# Altium PCB Instrumentation-Amplifier.PcbDoc
Units mm, origin at the board's own origin, x right, y up, seen from the top; angles counter-clockwise.
Board outline 100 x 100 mm, 2 copper layers (Top Layer, Bottom Layer); 19 components, 15 nets, 57 pads, 3 vias.
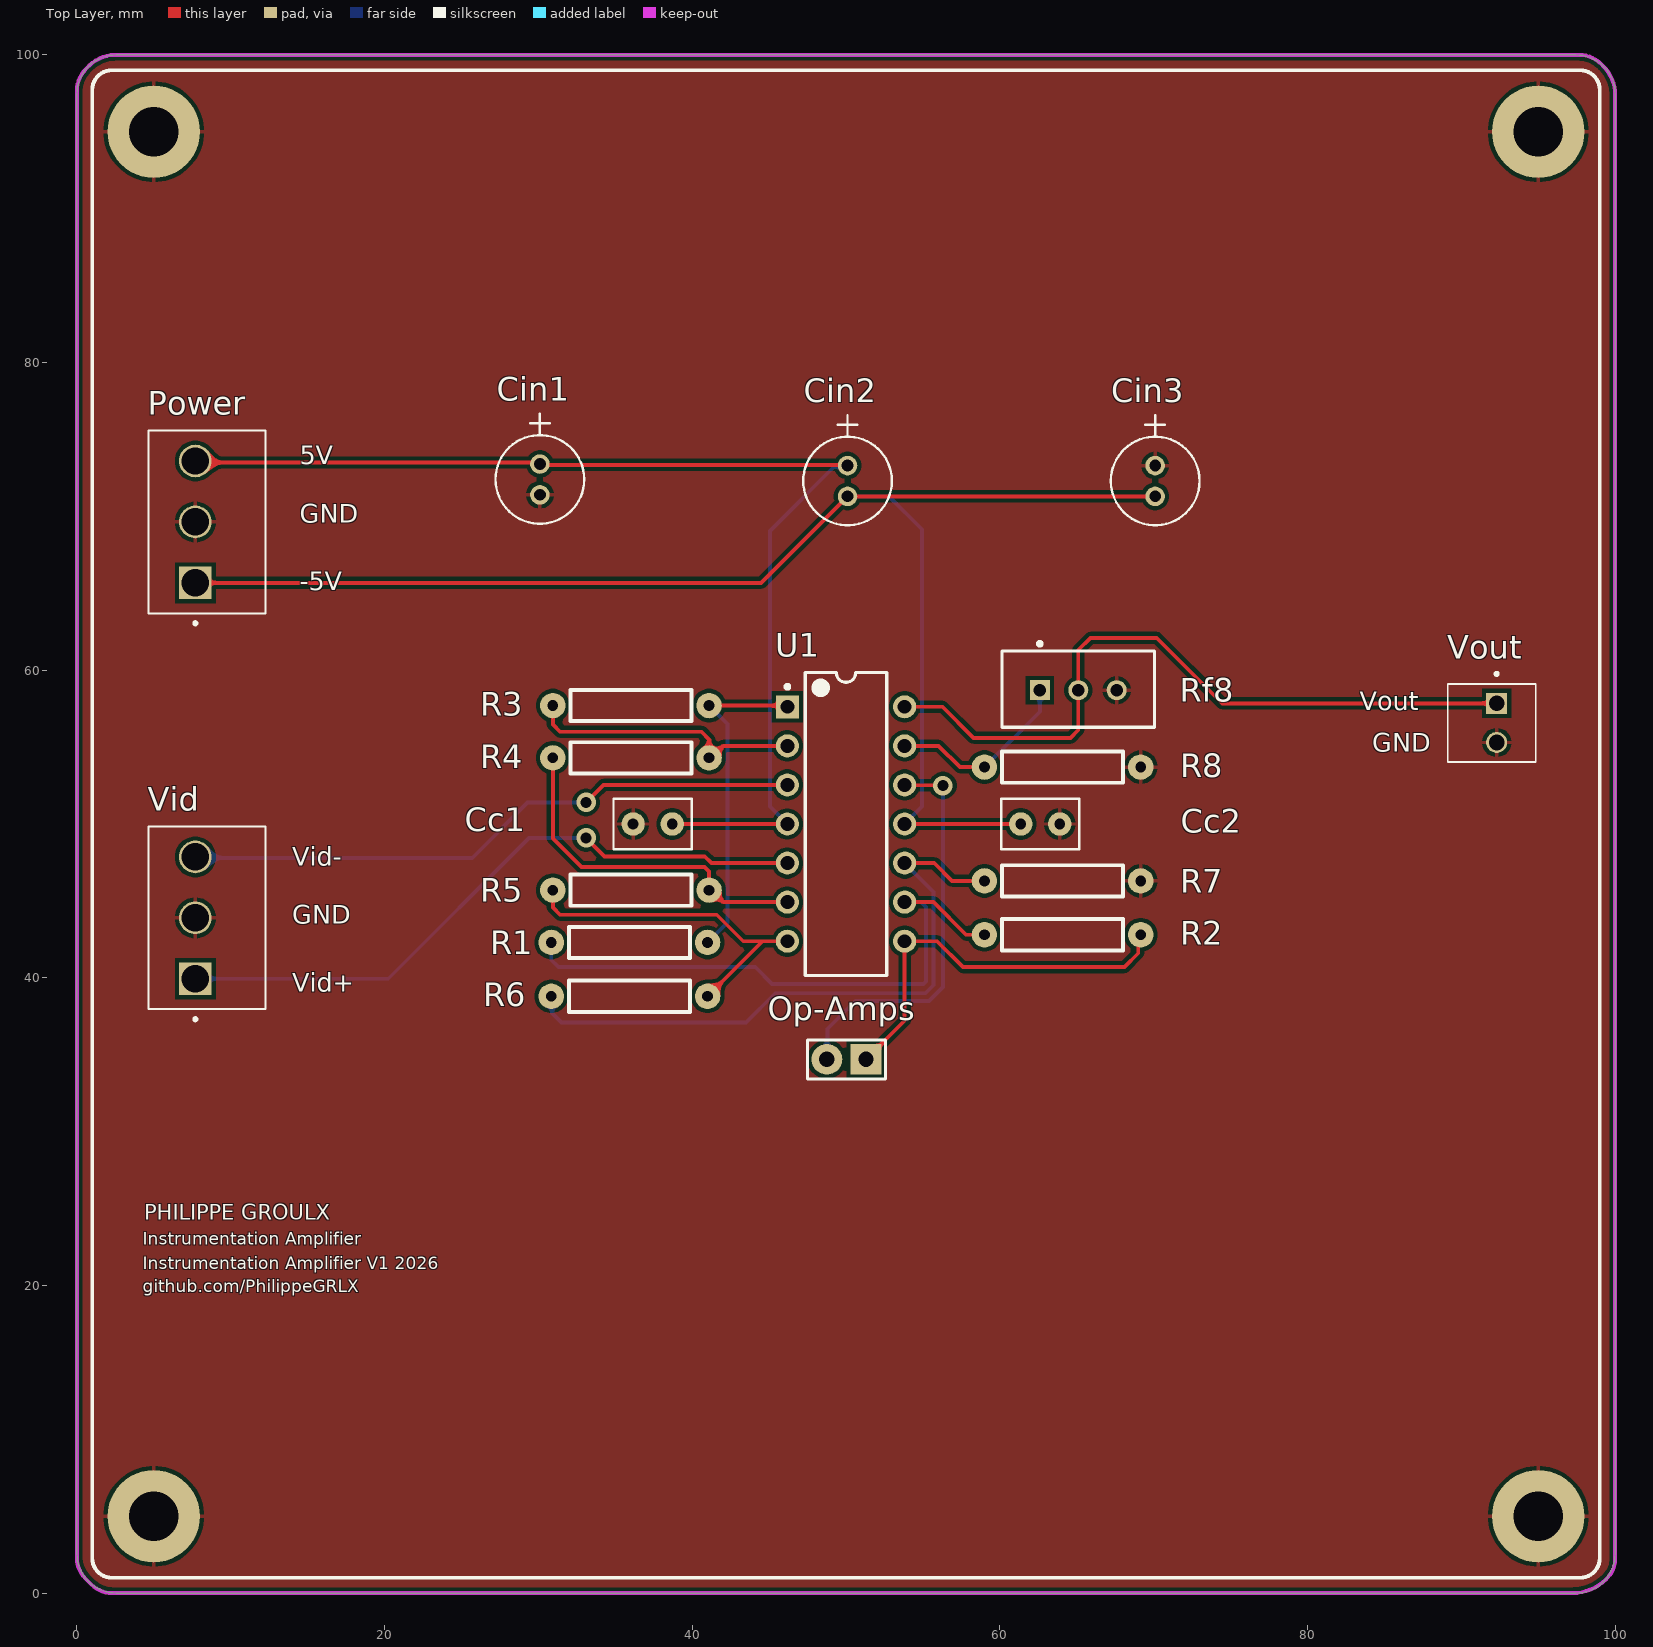
[diagram p0: Top Layer view]
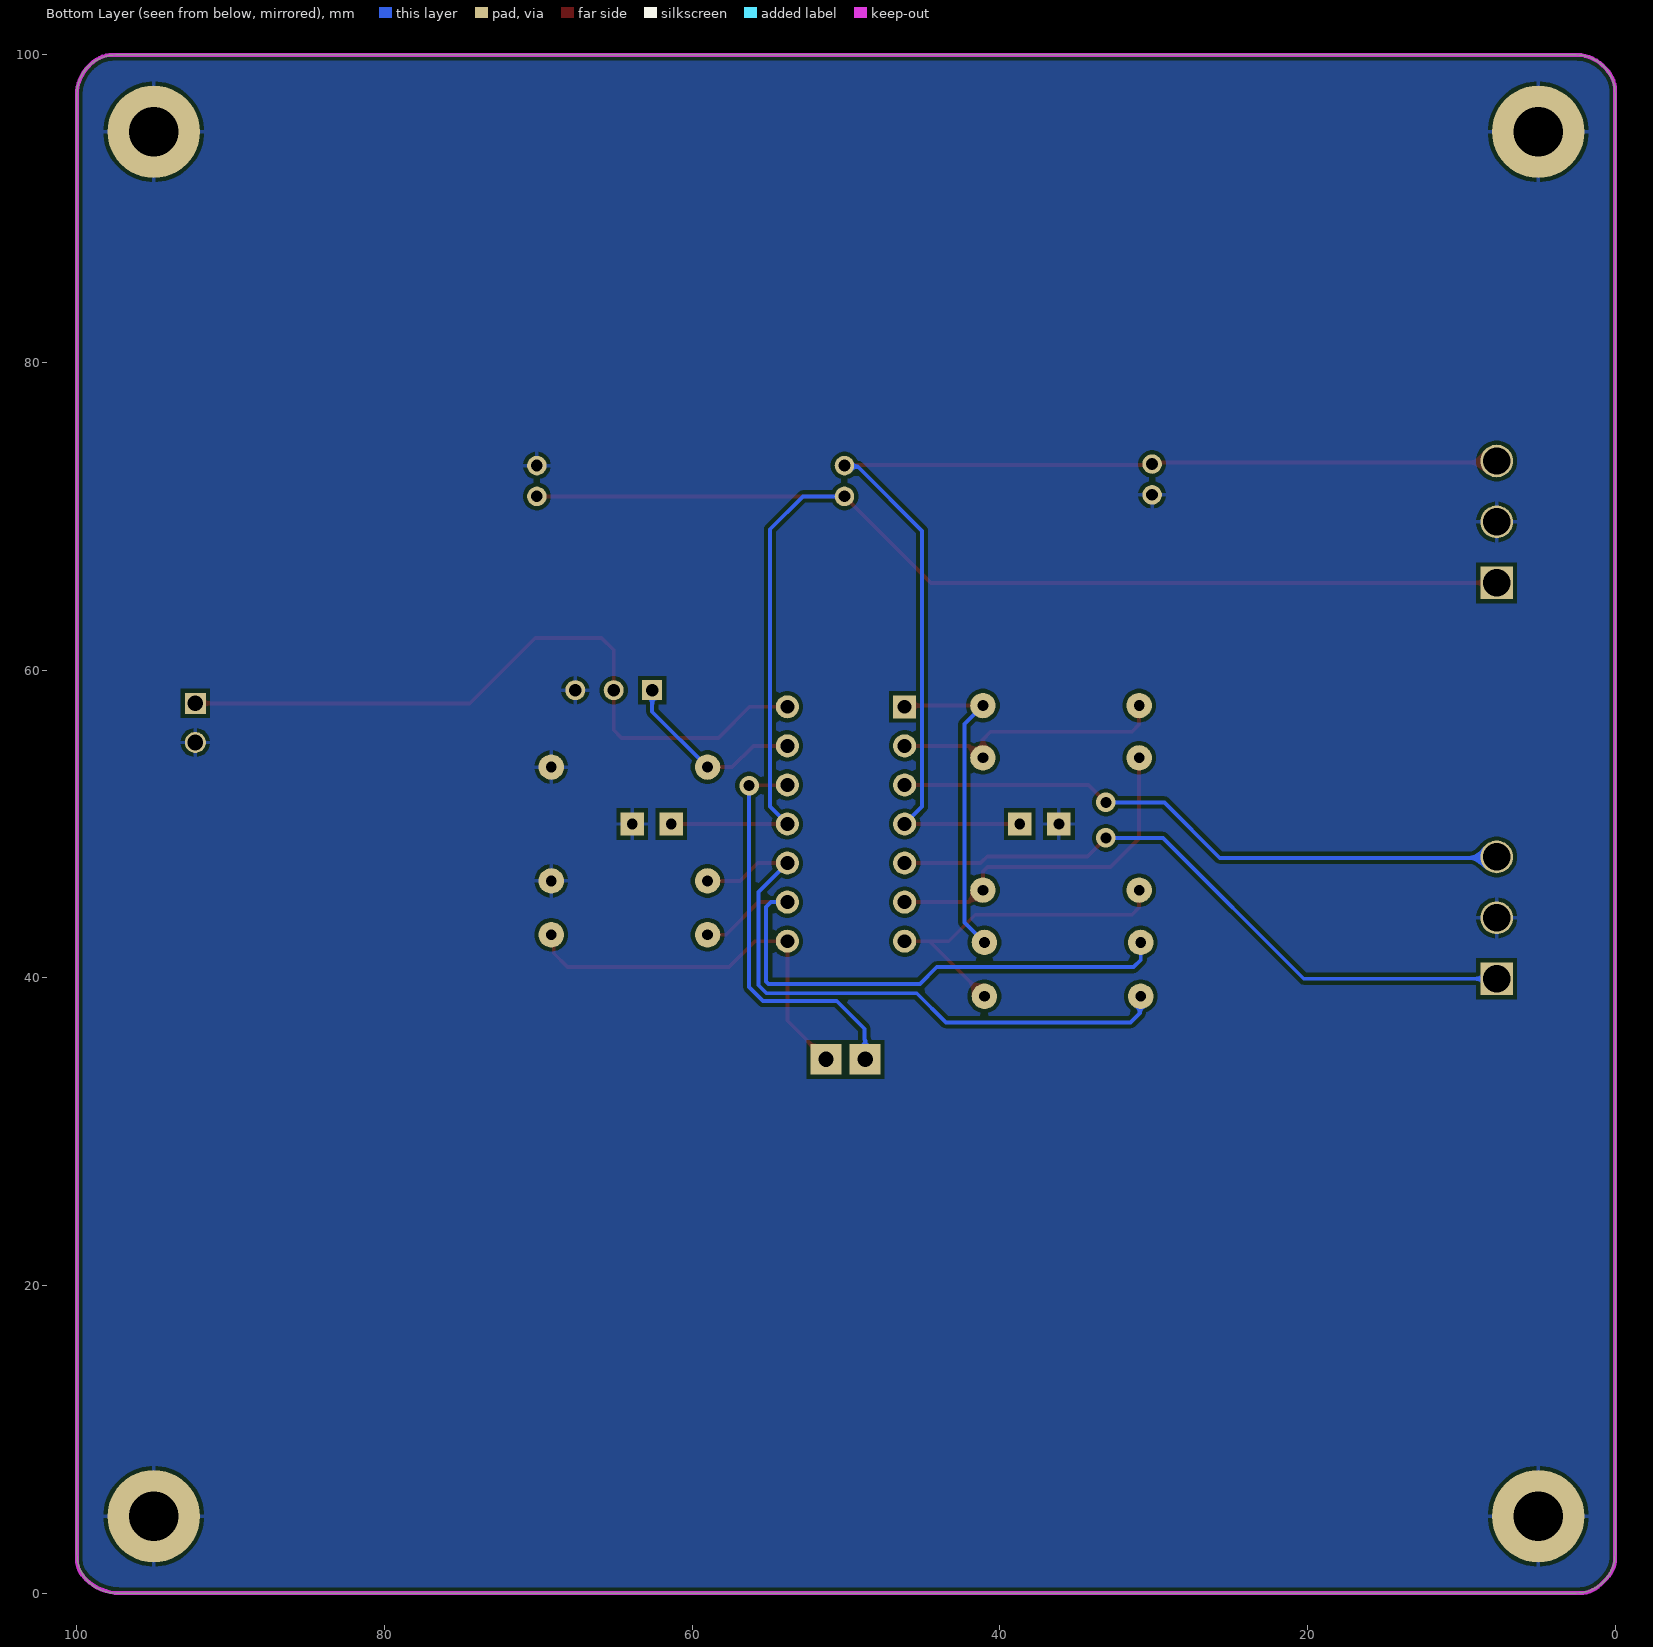
[diagram p1: Bottom Layer view, seen from below]
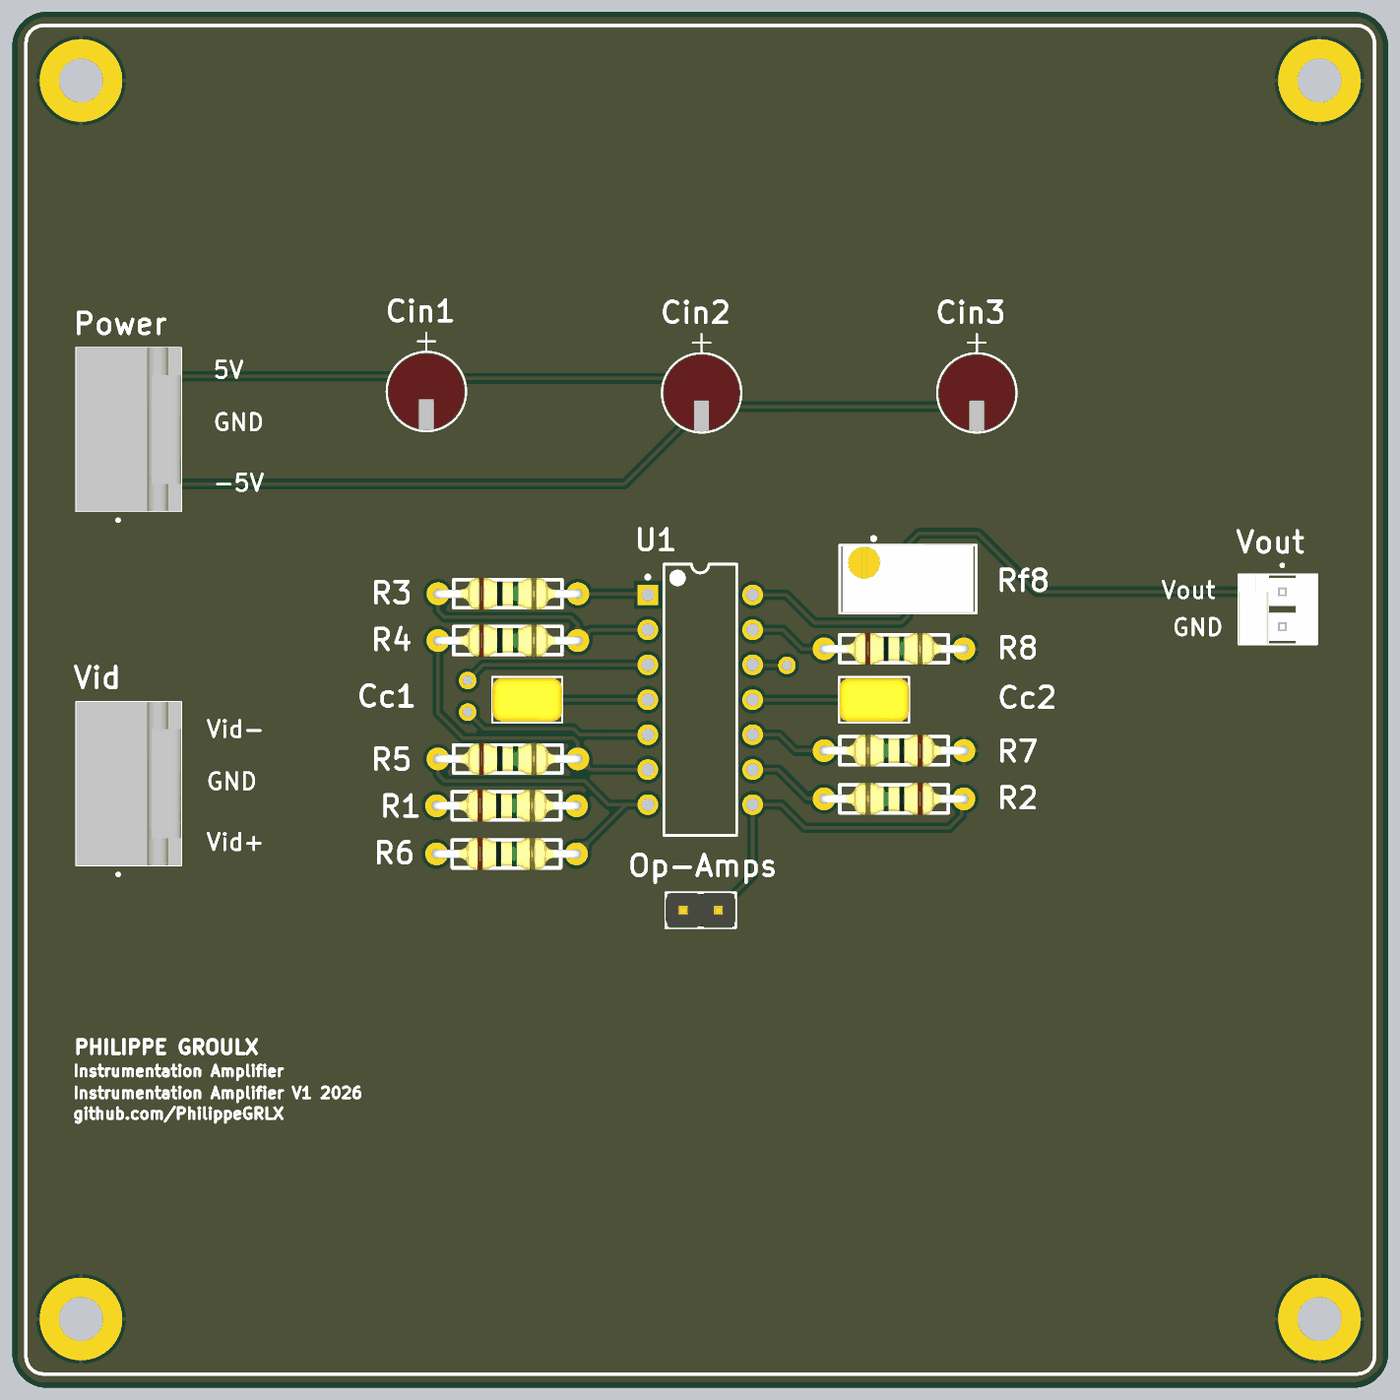
[diagram p2: 3D render of the assembled board from above, using the file's embedded part models]

## Layer stack, top to bottom
Top Solder: solder mask 0.0102, Solder Resist, Dk 3.5
Top Layer: signal copper 0.0356
Dielectric 1: dielectric 0.32, FR-4, Dk 4.8
Bottom Layer: signal copper 0.0356
Bottom Solder: solder mask 0.0102, Solder Resist, Dk 3.5

## Board outline
0,97.46 cw(c2.54,97.46) 2.54,100 97.46,100 cw(c97.46,97.46) 100,97.46 100,2.54 cw(c97.46,2.54) 97.46,0 2.54,0 cw(c2.54,2.54) 0,2.54 0,3.6

## Design rules (kind name [scope] priority, off if disabled: settings)
Clearance [All] p1: gap=0.254 ignorepadtopadclearanceinfootprint=FALSE
PolygonConnect [All] p1: connectstyle=Relief reliefconductorwidth=0.254 reliefentries=4 polygonreliefangle="90 Angle" airgapwidth=0.254
RoutingVias [All] p1: holewidth=0.711 width=1.27 viastyle="Through Hole" minholewidth=0.711 minwidth=1.27 maxholewidth=0.711 maxwidth=1.27
SolderMaskExpansion [All] p1: expansion=0 istentingtop=FALSE
SupplyNets "Schematic Supply Nets_2" [InNet('VDD')] p1: voltage=0.000
SupplyNets "Schematic Supply Nets_1" [InNet('GND')] p2: voltage=0.000
SupplyNets "Schematic Supply Nets" [InNet('VSS')] p3: voltage=0.000
Width [All] p1: maxlimit=0.254 minlimit=0.254 preferedwidth=0.254
30 further rules are at their usual default settings.

## Components (designator, comment, footprint, x,y, rotation, side; value= is the part's Value field where it differs from the comment)
Cc1 "Cap" "condensateur 0.1uf 100mil" 38.7,50 r180 top value=100nF
Cc2 "Cap" "condensateur 0.1uf 100mil" 61.36,50 r0 top value=100nF
Cin1 "Cap Pol1" RB7.6-15 30.1,73.4 r270 top value=10uF
Cin2 "Cap Pol1" RB7.6-15 50.1,73.3 r270 top value=10uF
Cin3 "Cap Pol1" RB7.6-15 70.1,73.3 r270 top value=10uF
Op-Amps "Jumper" "Header 2P 100mil" 51.3,34.7 r180 top
Power "Header 3" MTA_3M 7.7,65.68 r90 top
R1 "Res1" "Resistor_Axial 0.4" 30.84,42.3 r0 top value=1K
R2 "Res1" "Resistor_Axial 0.4" 69.16,42.8 r180 top value=1K
R3 "Res1" "Resistor_Axial 0.4" 30.94,57.7 r0 top value=1K
R4 "Res1" "Resistor_Axial 0.4" 30.94,54.3 r0 top value=200
R5 "Res1" "Resistor_Axial 0.4" 30.94,45.7 r0 top value=1K
R6 "Res1" "Resistor_Axial 0.4" 30.84,38.8 r0 top value=1K
R7 "Res1" "Resistor_Axial 0.4" 69.16,46.3 r180 top value=1K
R8 "Res1" "Resistor_Axial 0.4" 59,53.7 r0 top value=1K
Rf8 "67WR100KLF" FP-67W-MFG 65.1,58.765 r180 top
U1 "TL084ACN" N0014A 50,50 r0 top
Vid "Header 3" MTA_3M 7.7,39.94 r90 top
Vout "640456-2" TE_640456-2 92.3,57.84 r90 top

## Footprints (in the part's own frame and the unit in brackets; to place one, negate y for a bottom-side part, rotate by r counter-clockwise, add the part's x,y. Pads: shape width x height; smd on the part's side, far side on the other; paste and mask are expansions set on the pad)
"condensateur 0.1uf 100mil" [mil] "condensateur 0.1uf 100mil, Thru hole"
  round 60 / inner round 60 / far side rect 60x60 hole 27.56: 1(0,0) 2(100,0)
  silkscreen extent -50,-65 150,65, body extent -50,-63 150,62, height 309
FP-67W-MFG [mm]
  rect 1.3x1.3 hole 0.8 paste-2539.97 mask+0: 1(2.5,0.065)
  round 1.3 hole 0.8 paste-2539.97 mask+0: 2(0,0.065) 3(-2.5,0.065)
  silkscreen extent -4.95,-3.07 4.95,2.47, body extent -5.05,-2.58 5.05,2.58, height 0.25
"Header 2P 100mil" [mm] "Header male"
  rect 2x2 hole 1: 1(0,0)
  round 2 / inner round 2 / far side rect 2x2 hole 1: 2(2.54,0)
  silkscreen extent -1.27,-1.27 3.81,1.27, body extent -1.27,-1.27 3.81,1.27, height 8.59
MTA_3M [mil]
  rect 83.78x83.78 / inner round 83.78 / far side rect 83.78x83.78 hole 70 mask+4.02: 1(0,0)
  round 83.78 hole 70 mask+4.02: 2(155.91,0) 3(311.81,0)
  silkscreen extent -108,-180 390,120, body extent -78,-180 390,120, height 526
N0014A [mm] "DIP, 14-Leads, Body 19.7x6.6mm, Pitch 2.54mm"
  rect 1.5x1.5 hole 0.9: 1(-3.81,7.62)
  round 1.5 hole 0.9: 2(-3.81,5.08) 3(-3.81,2.54) 4(-3.81,0) 5(-3.81,-2.54) 6(-3.81,-5.08) 7(-3.81,-7.62) 8(3.81,-7.62) 9(3.81,-5.08) 10(3.81,-2.54) 11(3.81,0) 12(3.81,2.54) 13(3.81,5.08) 14(3.81,7.62)
  silkscreen extent -3.93,-9.85 2.65,9.85, body extent -3.95,-9.85 3.95,9.85, height 5.08
RB7.6-15 [mil] "Polarized Capacitor (Radial); 2 Leads"
  round 50 hole 30 paste-99999 mask+0: 1(0,0) 2(78.74,0)
  silkscreen extent -129,-113 153,114, body extent -69,-108 149,108, height 493
"Resistor_Axial 0.4" [mil] "Résistance 1/4 watt 0.4p"
  round 65 hole 27.56: 1(0,0) 2(400,0)
  silkscreen extent 45,-40 355,40, body extent -12,-45 412,46, height 116
TE_640456-2 [mm]
  rect 1.37x1.37 / inner round 1.37 / far side rect 1.37x1.37 hole 1.02: 1(0,0)
  round 1.37 hole 1.02: 2(-2.54,0)
  silkscreen extent -3.81,-2.54 2.02,3.18, body extent -3.81,-2.54 1.27,3.17, height 10.03

## Part data
Cc1 Cc2: "Capacitor", LatestRevisionDate=17-Jul-2002, LatestRevisionNote="Re-released for DXP Platform.", PackageDescription="Radial Cap, Thru-Hole; 2 Leads; 0.3 in Pin Spacing", PackageReference=RAD-0.3, Published=8-Jun-2000, Publisher="Altium Limited"
Cin1 Cin2 Cin3: "Polarized Capacitor (Radial)", LatestRevisionDate=17-Jul-2002, LatestRevisionNote="Re-released for DXP Platform.", PackageDescription="Polarized Capacitor (Radial); 2 Leads", PackageReference=RB7.6-15, Published=8-Jun-2000, Publisher="Altium Limited"
Op-Amps: library part "header 2 pin_UL", "CONN HEADER VERT 3POS 2.54MM", Digikey=732-5315-ND, LatestRevisionDate=17-Jul-2002, LatestRevisionNote="Re-released for DXP Platform.", Publisher="Altium Limited"
Power Vid: "Header, 3-Pin", LatestRevisionDate=17-Jul-2002, LatestRevisionNote="Re-released for DXP Platform.", Publisher="Altium Limited"
R1 R2 R3 R4 R5 R6 R7 R8: "Resistor", LatestRevisionDate=17-Jul-2002, LatestRevisionNote="Re-released for DXP Platform.", PackageDescription="Axial Device, Thru-Hole; 2 Leads; 0.3 in Pin Spacing", PackageReference=AXIAL-0.3, Published=8-Jun-2000, Publisher="Altium Limited"
Rf8: library part CMP-50449-000002-1, "TRIMMER 100K OHM 0.5W PC PIN TOP", Max Operating Temperature=125°C, Max Power Dissipation=500mW, Min Operating Temperature=-55°C, Package Quantity=100, Resistance=100kR, Resistance Tolerance=10%, Resistor Type=Cermet, Temperature Coefficient=100ppm/°C, Voltage Rating=200V, Depth=4.95mm, Height=0.409inch, Lead Free="Lead Free", Length=9.53mm, Military Standard=Not, Mount="Through Hole", Number of Turns=20, Packaging=Bulk, Power Rating=500mW, Radiation Hardening=No, REACH SVHC="No SVHC", RoHS Compliant=Yes, Series=67, Technology=CERMET, Termination=Pin, Tolerance=10%, Type=Potentiometer, Voltage Rating (DC)=200V, Weight=1.1g
U1: library part CMP-0017-00814-2, "JFET-Input Operational Amplifier, 7 to 36 V, 0 to 70 degC, 14-pin DIP (N14), Pb-Free (RoHS)", Manufacturer="Texas Instruments", Rating=Catalog, Total Supply Voltage(Max)(+5V is 5, +/-5V is 10)=36, Total Supply Voltage(Min)(+5V is 5, +/-5V is 10)=7, CMRR(Min)(dB)=75, Code_JEDEC=MS-001, ComponentLink1Description="Manufacturer URL", ComponentLink1URL=http://www.ti.com/, ComponentLink2Description=Datasheet, ComponentLink2URL=http://www.ti.com/lit/ds/symlink/tl084a.pdf, ComponentLink3Description="Package Specification", ComponentLink3URL=http://www.ti.com/lit/ml/mpdi002c/mpdi002c.pdf, DatasheetVersion=SLOS081G, Eco-Plan="Pb-Free (RoHS)", GBW(Typ)(MHz)=3, IIB(Max)(pA)=200, Iq per channel(Max)(mA)=2.8, Mounting Technology="Through Hole", Number of Channels=4, Offset Drift(Typ)(uV/C)=18, PackageDescription="14-Pin Plastic In-Line, Body 19.305 x 6.35 mm, Pitch 2.54 mm", PackageReference=N0014A, PackageVersion="4040049/E, 12/2002", PartNumber=TL084ACN, Slew Rate(Typ)(V/us)=13, Sub Family="General Purpose Amplifier, High Supply Voltage Amplifier (>=30V)", Vio (25C)(Max)(mV)=6, Vn at 1kHz(Typ)(nV/rtHz)=18
Vout: "Header Friction Lock MTA-100 2 250 VAC Polyester Tin Copper Alloy Tin", Package=None, Check_prices=https://www.snapeda.com/parts/640456-2/TE+Connectivity+AMP+Connectors/view-part/?ref=eda, MF="TE Connectivity", MP=640456-2, SnapEDA_Link=https://www.snapeda.com/parts/640456-2/TE+Connectivity+AMP+Connectors/view-part/?ref=snap

## Free pads (board coordinates)
  round 6 hole 3.2: 1(5,5) 1(5,95) 1(95,5) 1(95,95)

## Via types
v1: diameter 1.27, hole 0.711, Top Layer to Bottom Layer, 3 vias

## Nets (pads, with @x,y where several pads share a name; then routed paths per layer and width w, separated by ;. In a path a pad name is that pad's centre, name@x,y a point inside that pad or via, vN(x,y) a via of type N, cw(c..) or ccw(c..) an arc to the next point about the centre after c; other vN are vias at no path point)
GND: Cc1.2 Cc2.2 Cin1.2 Cin3.1 pad.1 Power.2 R7.1 R8.2 Rf8.3 Vid.2 Vout.2
NetOp-Amps_1: Op-Amps.1 R2.1 U1.8 | length 26.2
  Top Layer w0.254: Op-Amps.1 53.81,37.21 U1.8 55.92,42.38 57.6,40.7 68.1,40.7 69,41.6 69,42.64 R2.1
NetOp-Amps_2: Op-Amps.2 U1.12 | length 26.2
  Top Layer w0.254: U1.12 53.83,52.52 56.28,52.52 v1(56.3,52.5)
  Bottom Layer w0.254: Op-Amps.2 48.76,35.96 48.8,36 48.8,36.692 50.6,38.492 55.392,38.492 56.3,39.4 v1(56.3,52.5)
NetR1_1: R1.1 R2.2 U1.9 | length 38.6
  Top Layer w0.254: U1.9 55.68,44.92 57.8,42.8 R2.2
  Bottom Layer w0.254: R1.1 30.84,41.16 31.3,40.7 44.1,40.7 45.2,39.6 55.043,39.6 55.192,39.749 55.192,44.608 54.88,44.92 U1.9
NetR1_2: R1.2 R3.2 U1.1 | length 21.6
  Top Layer w0.254: R3.2 46.11,57.7 U1.1
  Bottom Layer w0.254: R1.2 42.306,43.606 42.306,56.493 R3.2
NetR3_1: R3.1 R4.2 U1.2 | length 18.4
  Top Layer w0.254: R3.1 30.94,56.46 31.4,56 40.6,56 41.1,55.5 R4.2 41.246,54.3 42.026,55.08 U1.2
NetR4_1: R4.1 R5.2 U1.6 | length 22.9
  Top Layer w0.254: R4.1 30.94,49.06 32.8,47.2 40.8,47.2 41.1,46.9 R5.2 41.246,45.7 42.026,44.92 U1.6
NetR5_1: R5.1 R6.2 U1.7 | length 22.4
  Top Layer w0.254: R5.1 30.94,44.56 31.4,44.1 41.6,44.1 43.32,42.38 44.58,42.38 ; R6.2 44.58,42.38 ; U1.7 44.58,42.38
NetR6_1: R6.1 R7.2 U1.10 | length 41.6
  Top Layer w0.254: U1.10 55.74,47.46 56.9,46.3 R7.2
  Bottom Layer w0.254: R6.1 30.9,38.74 30.9,37.7 31.5,37.1 43.5,37.1 45.4,39 55.182,39 55.7,39.518 55.7,45.57 U1.10
NetR8_1: R8.1 Rf8.1 U1.13 | length 12.3
  Top Layer w0.254: U1.13 56.02,55.08 57.4,53.7 R8.1
  Bottom Layer w0.254: R8.1 62.6,57.3 Rf8.1
NetRf8_2: Rf8.2 U1.14 Vout.1 | length 46.8
  Top Layer w0.254: U1.14 56.28,57.62 58.3,55.6 64.6,55.6 65.1,56.1 Rf8.2 65.1,61.3 65.9,62.1 70.2,62.1 74.46,57.84 Vout.1
NetU1_3: U1.3 Vid.3 | length 40.5
  Top Layer w0.254: v1(33.1,51.4) 34.24,52.54 U1.3
  Bottom Layer w0.254: Vid.3 7.76,47.8 25.7,47.8 29.3,51.4 v1(33.1,51.4)
NetU1_5: U1.5 Vid.1 | length 43
  Top Layer w0.254: v1(33.1,49.1) 34.3,47.9 40.818,47.9 41.258,47.46 U1.5
  Bottom Layer w0.254: Vid.1 20.24,39.94 29.4,49.1 v1(33.1,49.1)
VDD: Cc1.1 Cin1.1 Cin2.1 Power.3 U1.4 | length 76.3
  Top Layer w0.254: Power.3 7.8,73.5 30,73.5 Cin1.1 30.15,73.35 50.05,73.35 Cin2.1 ; Cc1.1 U1.4
  Bottom Layer w0.254: U1.4 45.059,51.131 45.059,69.059 49.236,73.236 50.036,73.236 Cin2.1
VSS: Cc2.1 Cin2.2 Cin3.2 Power.1 U1.11 | length 97.6
  Top Layer w0.254: Power.1 44.48,65.68 Cin2.2 Cin3.2 ; U1.11 Cc2.1
  Bottom Layer w0.254: Cin2.2 52.8,71.3 54.941,69.159 54.941,51.131 U1.11

## Polygon pours and split planes (outlines as drawn)
GND on Top Layer "GND_L01_P000" (solid, pour order 0): 0,99.9 0.1,100 100,100 100,0.1 99.9,0 0,0
GND on Bottom Layer "GND_L02_P001" (solid, pour order 1): 0.1,99.9 100,99.9 100,0.1 0,0.1

## Keep-outs
Keep-Out Layer:
  lines w0.254: 0,2.3 ccw(c1.931,2.3) 0.566,0.934 0.934,0.566 ccw(c2.3,1.931) 2.3,0 83.1,0 97.23,0 ccw(c97.23,3.066) 99.398,0.898 99.5,1 ccw(c98.293,2.207) 100,2.207 100,96.1 100,97.4 ccw(c97.344,97.4) 99.222,99.278 99.1,99.4 ccw(c97.651,97.951) 97.651,100 2.5,100 ccw(c2.5,97.586) 0.793,99.293 0.6,99.1 ccw(c2.049,97.651) 0,97.651 0,96.5 0,3.8 0,2.3

## Silkscreen, mask and mechanical layers (free items; w line width, h text height)
Top Overlay:
  lines w0.254: 1,2.27 ccw(c2.27,2.27) 2.27,1 97.73,1 ccw(c97.73,2.27) 99,2.27 99,97.73 ccw(c97.73,97.73) 97.73,99 2.27,99 ccw(c2.27,97.73) 1,97.73 1,94.3 1,2.27
  text "5V" at 14.5,73.4 h1.2
  text "GND" at 14.5,69.6 h1.2
  text "-5V" at 14.5,65.2 h1.2
  text "Vout" at 83.4,57.4 h1.2
  text "GND" at 84.2,54.7 h1.2
  text "Vid-" at 14,47.3 h1.2
  text "GND" at 14,43.5 h1.2
  text "Vid+" at 14,39.1 h1.2
  text "PHILIPPE GROULX" at 4.381,24.281 h1
  text "Instrumentation Amplifier" at 4.281,22.648 h0.8
  text "Instrumentation Amplifier V1 2026" at 4.281,21.048 h0.8
  text "github.com/PhilippeGRLX" at 4.281,19.548 h0.8